# Altium PCB FT4232.PcbDoc
Units mm, origin at the board's own origin, x right, y up, seen from the top; angles counter-clockwise.
Board outline 40.2 x 40.2 mm, 2 copper layers (Top Layer, Bottom Layer); 46 components, 43 nets, 208 pads, 37 vias.
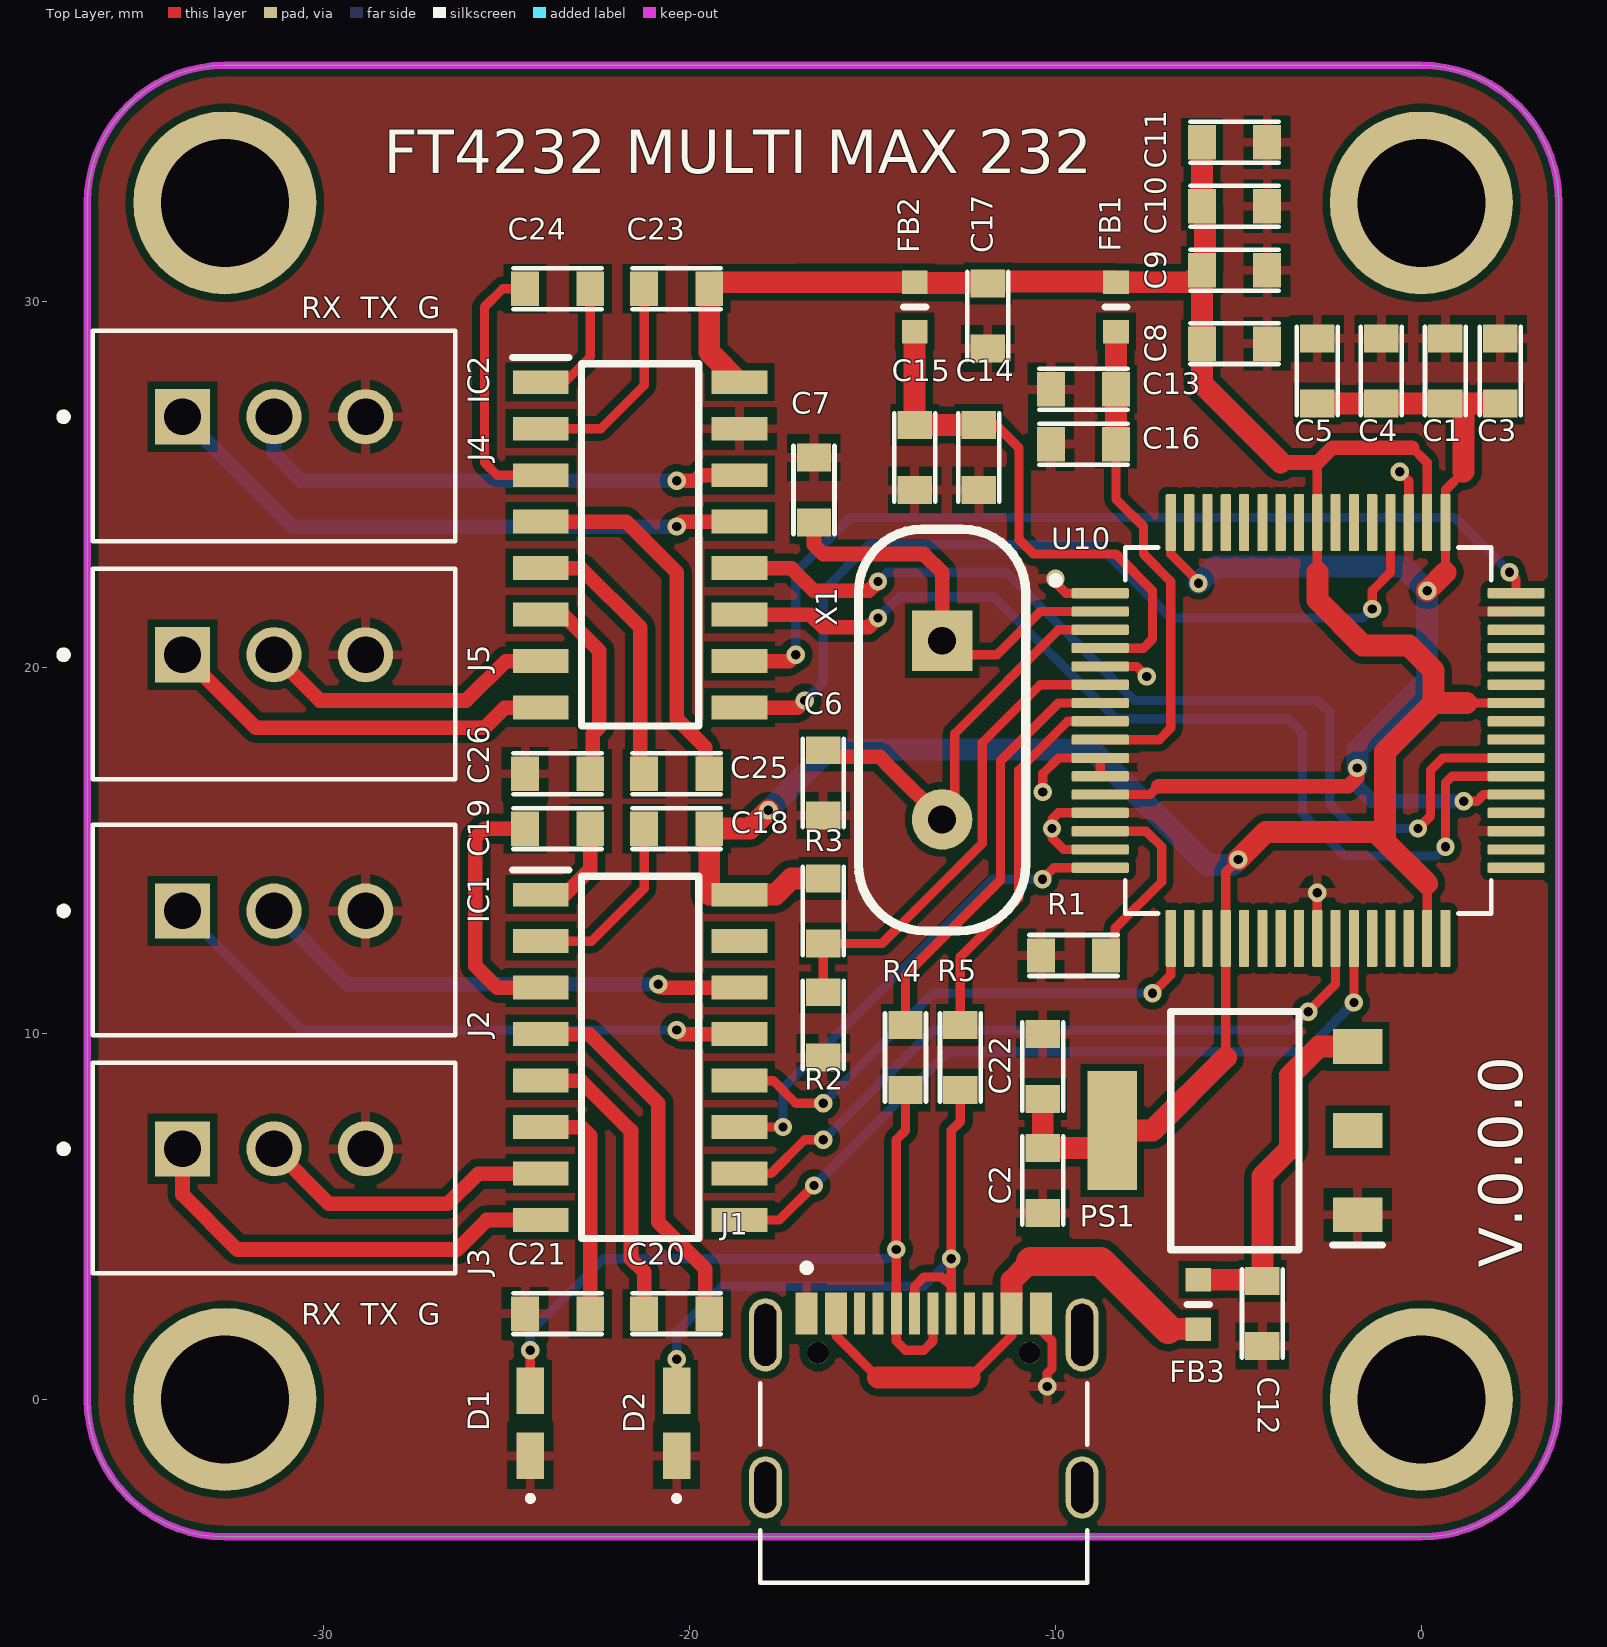
[diagram p0: Top Layer view]
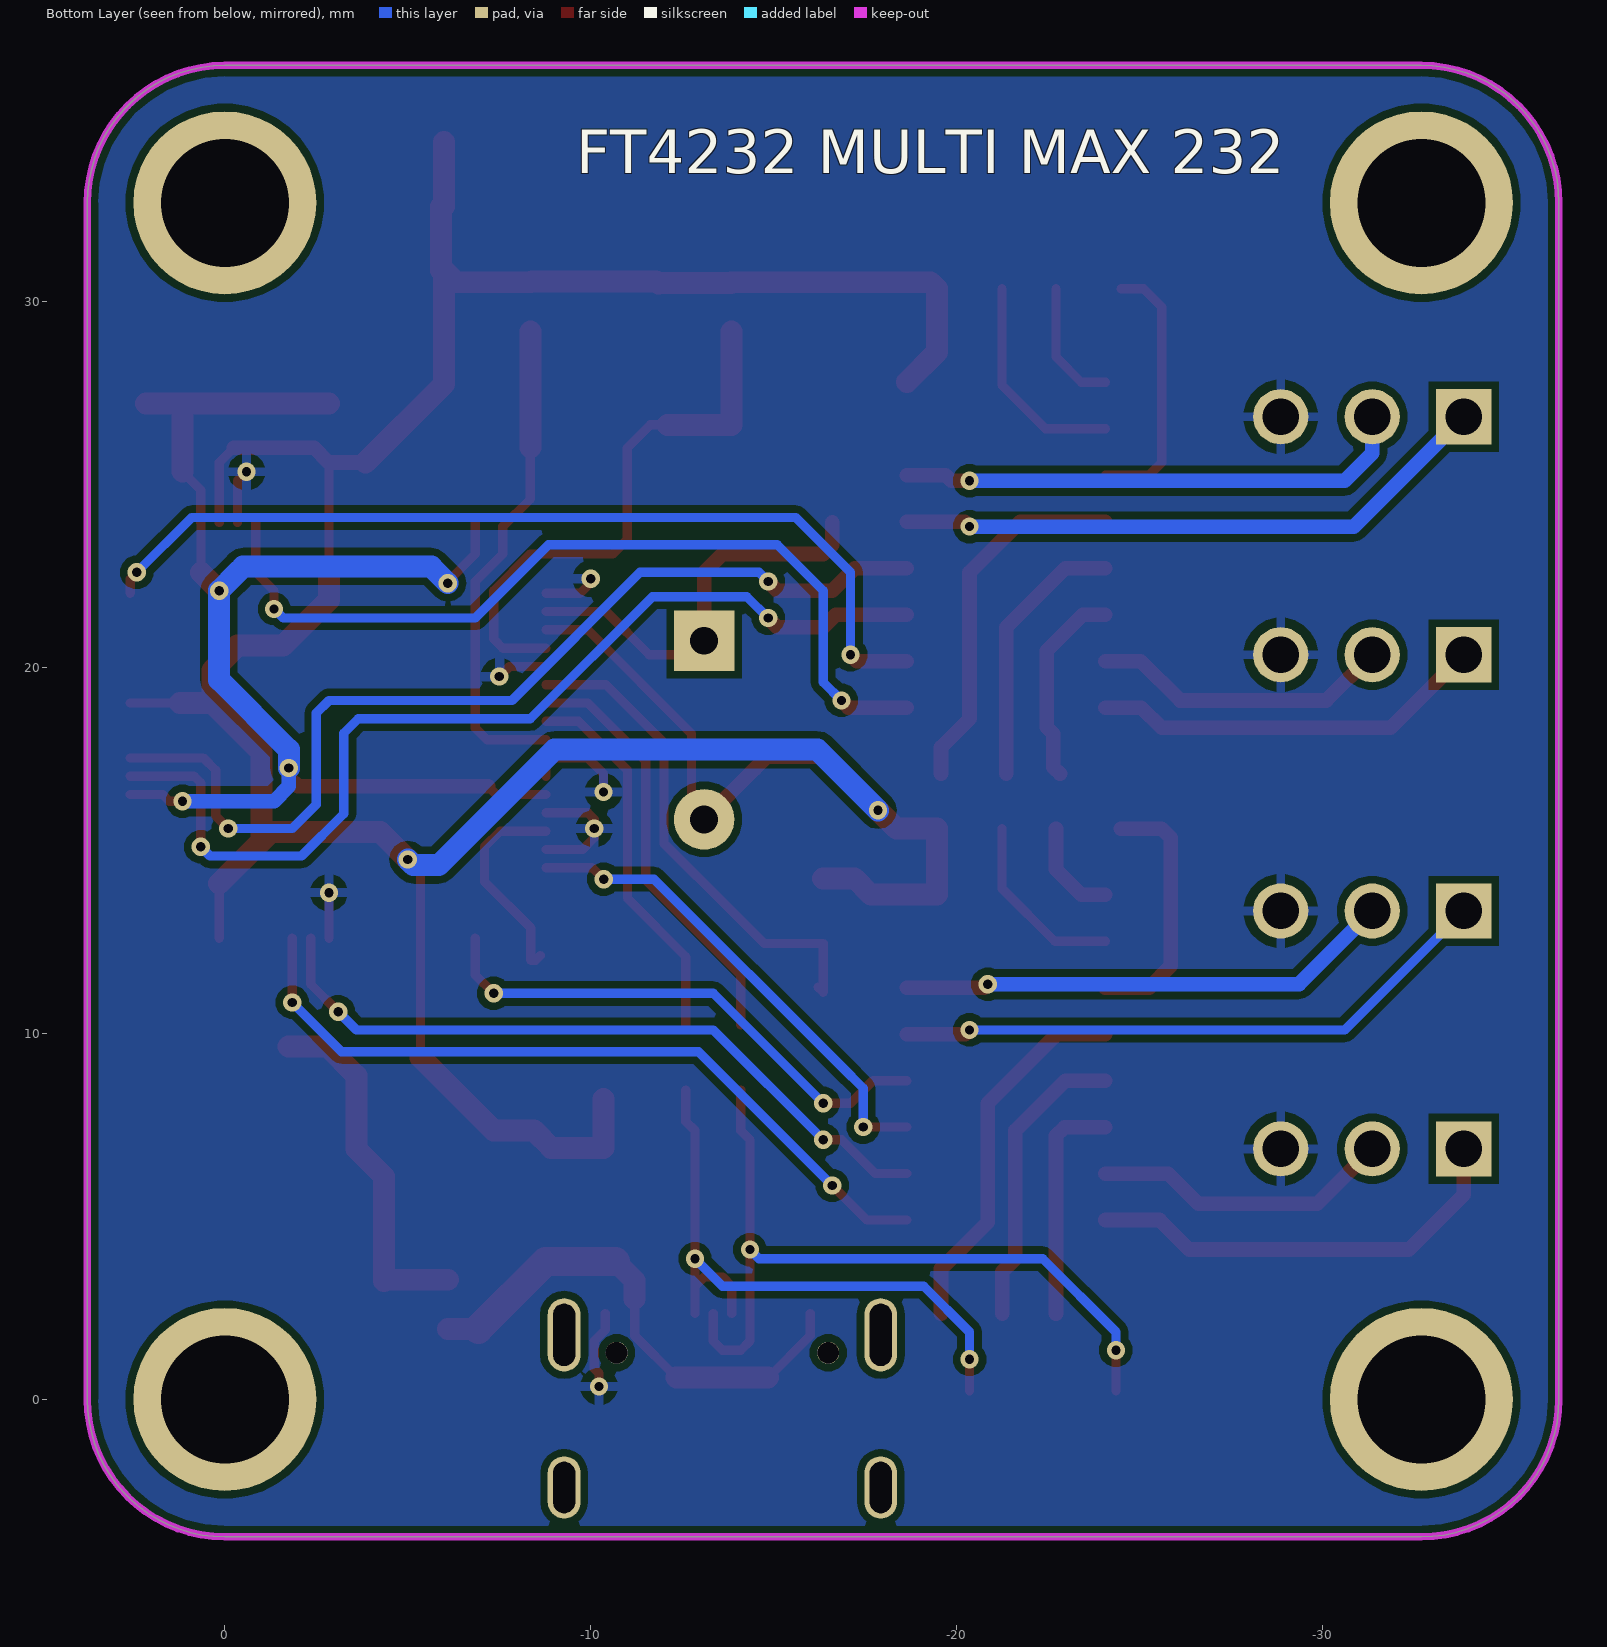
[diagram p1: Bottom Layer view, seen from below]
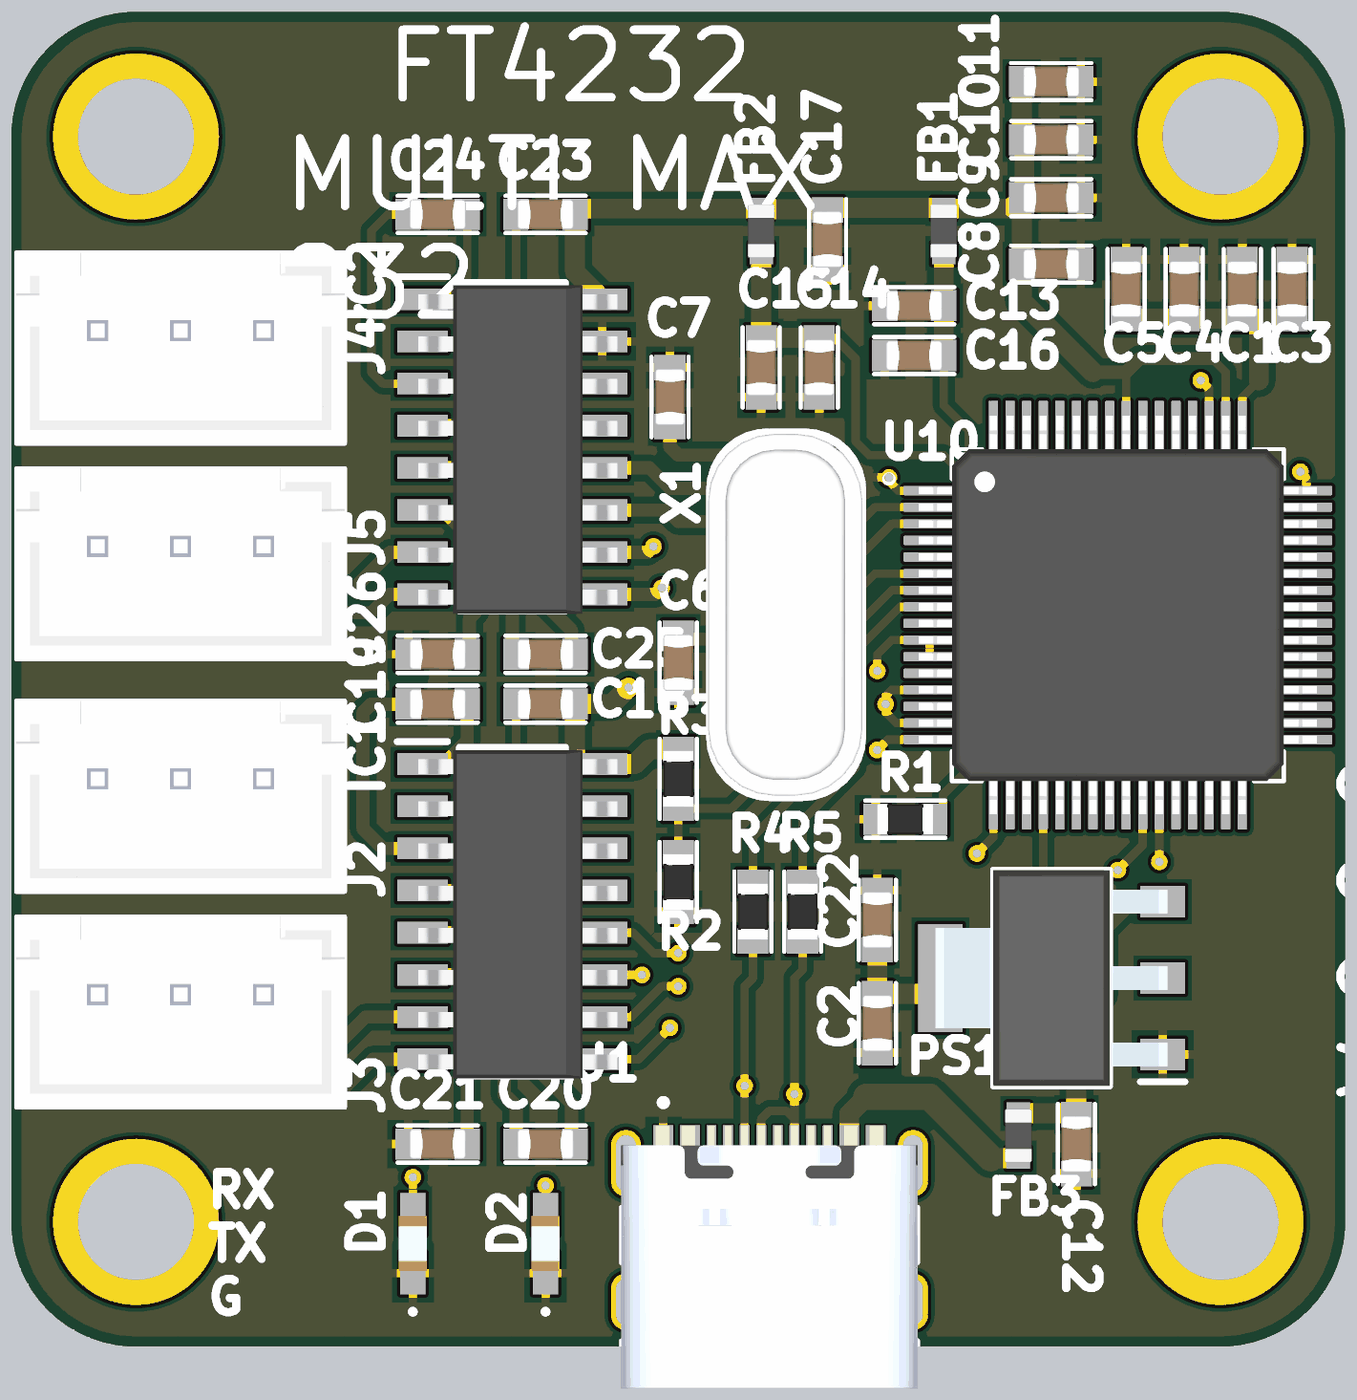
[diagram p2: 3D render of the assembled board from above, using the file's embedded part models]

## Layer stack, top to bottom
Top Solder: solder mask 0.0102, Solder Resist, Dk 3.5
Top Layer: signal copper 0.0356
Dielectric 1: dielectric 0.32, FR-4, Dk 4.8
Bottom Layer: signal copper 0.0356
Bottom Solder: solder mask 0.0102, Solder Resist, Dk 3.5

## Board outline
-36.444,0 -36.444,32.689 cw(c-32.689,32.689) -32.689,36.444 0,36.444 cw(c0,32.689) 3.756,32.689 3.756,0 cw(c0,0) 0,-3.756 -32.689,-3.756 cw(c-32.689,0)

## Design rules (kind name [scope] priority, off if disabled: settings)
Clearance [All] p1: gap=0.2 ignorepadtopadclearanceinfootprint=FALSE
DiffPairsRouting [All] p1: maxlimit=0.127 minlimit=0.127 mostfreqgap=0.127 toplayer_minwidth=0.279 toplayer_maxwidth=0.279 toplayer_prefwidth=0.279 bottomlayer_minwidth=0.279 bottomlayer_maxwidth=0.279 bottomlayer_prefwidth=0.279 impedanceprofiledriven=TRUE impedanceprofileid={888D4611-07E8-40D3-83D1-E74B6004580A} impedanceprofilevalue=90.000000 maxuncoupledlength=12.7
PolygonConnect [All] p1: connectstyle=Relief reliefconductorwidth=0.254 reliefentries=4 polygonreliefangle="90 Angle" airgapwidth=0.254
RoutingVias [All] p1: holewidth=0.711 width=1.27 viastyle="Through Hole" minholewidth=0.711 minwidth=1.27 maxholewidth=0.711 maxwidth=1.27
SolderMaskExpansion [All] p1: expansion=0.102 istentingtop=FALSE
Width [All] p1: maxlimit=0.6 minlimit=0.254 preferedwidth=0.4
29 further rules are at their usual default settings.

## Components (designator, comment, footprint, x,y, rotation, side; value= is the part's Value field where it differs from the comment)
C1 "100nf" "1608_[0603] Capacitor" 0.656,28.094 r90 top
C2 "100nf" "1608_[0603] Capacitor" -10.344,5.983 r270 top
C3 "100nf" "1608_[0603] Capacitor" 2.156,28.094 r90 top
C4 "100nf" "1608_[0603] Capacitor" -1.094,28.094 r90 top
C5 "100nf" "1608_[0603] Capacitor" -2.844,28.094 r90 top
C6 "33pF" "1608_[0603] Capacitor" -16.344,16.844 r270 top
C7 "33pF" "1608_[0603] Capacitor" -16.594,24.844 r90 top
C8 "100nf" "1608_[0603] Capacitor" -5.102,28.844 r0 top
C9 "100nf" "1608_[0603] Capacitor" -5.102,30.844 r0 top
C10 "100nf" "1608_[0603] Capacitor" -5.102,32.594 r0 top
C11 "100nf" "1608_[0603] Capacitor" -5.102,34.344 r0 top
C12 "100nf" "1608_[0603] Capacitor" -4.344,2.344 r270 top
C13 "4.7uf" "1608_[0603] Capacitor" -9.233,27.594 r180 top
C14 "4.7uf" "1608_[0603] Capacitor" -12.094,25.733 r270 top
C15 "100nf" "1608_[0603] Capacitor" -13.844,25.733 r270 top
C16 "100nf" "1608_[0603] Capacitor" -9.233,26.094 r180 top
C17 "0.1uF/25V" "1608_[0603] Capacitor" -11.844,29.594 r270 top
C18 "0.1uF/25V" "1608_[0603] Capacitor" -20.344,15.594 r0 top
C19 "0.1uF/25V" "1608_[0603] Capacitor" -23.594,15.594 r180 top
C20 "0.1uF/25V" "1608_[0603] Capacitor" -20.344,2.344 r180 top
C21 "0.1uF/25V" "1608_[0603] Capacitor" -23.594,2.344 r0 top
C22 "0.1uF/25V" "1608_[0603] Capacitor" -10.344,9.094 r90 top
C23 "0.1uF/25V" "1608_[0603] Capacitor" -20.344,30.344 r0 top
C24 "0.1uF/25V" "1608_[0603] Capacitor" -23.594,30.344 r0 top
C25 "0.1uF/25V" "1608_[0603] Capacitor" -20.344,17.094 r0 top
C26 "0.1uF/25V" "1608_[0603] Capacitor" -23.594,17.094 r0 top
D1 "PGB1010603" PGB1010603NRHF -24.344,-0.656 r90 top
D2 "PGB1010603" PGB1010603NRHF -20.344,-0.656 r90 top
FB1 "BLM18AG601SN1D" BLM18SP221SN1B -8.344,29.844 r270 top
FB2 "BLM18AG601SN1D" BLM18SP221SN1B -13.844,29.844 r270 top
FB3 "BLM18AG601SN1D" BLM18SP221SN1B -6.094,2.594 r90 top
IC1 "MAX3232ESE" SOIC127P600X175-16N -21.344,9.344 r0 top
IC2 "MAX3232ESE" SOIC127P600X175-16N -21.344,23.344 r0 top
J1 "TYPE-C-31-M-12" HRO_TYPE-C-31-M-12 -13.594,-2.406 r0 top
J2 "B3B-XH-A(LF)(SN)" JST_B3B-XH-A(LF)(SN) -31.344,12.819 r180 top
J3 "B3B-XH-A(LF)(SN)" JST_B3B-XH-A(LF)(SN) -31.344,6.319 r180 top
J4 "B3B-XH-A(LF)(SN)" JST_B3B-XH-A(LF)(SN) -31.344,26.319 r180 top
J5 "B3B-XH-A(LF)(SN)" JST_B3B-XH-A(LF)(SN) -31.344,19.819 r180 top
PS1 "ADP3338AKCZ-3.3RL7" SOT230P700X180-4N -5.094,7.344 r180 top
R1 "12k" "1608_[0603] Resistor" -9.504,12.127 r180 top
R2 "100k" "1608_[0603] Resistor" -16.344,10.233 r270 top
R3 "1k" "1608_[0603] Resistor" -16.344,13.344 r270 top
R4 "10R" "1608_[0603] Resistor" -14.094,9.344 r90 top
R5 "10R" "1608_[0603] Resistor" -12.594,9.344 r90 top
U10 "FT4232HL-Tray" QFP50P1200X1200X160-64N -3.094,18.274 r0 top
X1 "12MHz" "X TAL" -13.094,20.724 r270 top

## Footprints (in the part's own frame and the unit in brackets; to place one, negate y for a bottom-side part, rotate by r counter-clockwise, add the part's x,y. Pads: shape width x height; smd on the part's side, far side on the other; paste and mask are expansions set on the pad)
"1608_[0603] Capacitor" [mil] "Chip Capacitor, Body 1.6x0.8mm, IPC High Density"
  rect 30x37 smd: 1(-35,0) 2(35,0)
  silkscreen extent -48,-22 48,22, body extent -33,-18 33,18, height 35
"1608_[0603] Resistor" [mil] "Chip Resistor, Body 1.6x0.8mm, IPC High Density"
  rect 30x37 smd: 1(-35,0) 2(35,0)
  silkscreen extent -48,-22 48,22, body extent -33,-18 33,18, height 22
BLM18SP221SN1B [mm]
  rect 0.65x0.7 smd: 1(-0.675,0) 2(0.675,0)
  silkscreen extent 0,-0.3 0,0.3, body extent -0.8,-0.4 0.8,0.4, height 0.8
HRO_TYPE-C-31-M-12 [mm]
  rect 0.6x1.14 smd mask+0.05: A1_B12(-3.2,4.75) A4_B9(-2.4,4.75) B1_A12(3.2,4.75) B4_A9(2.4,4.75)
  rect 0.3x1.14 smd mask+0.05: A5(-1.25,4.75) A6(-0.25,4.75) A7(0.25,4.75) A8(1.25,4.75) B5(1.75,4.75) B6(0.75,4.75) B7(-0.75,4.75) B8(-1.75,4.75)
  oval 0.9x2 hole 0.6 slot 1.7 at 90 deg: S1(-4.325,4.17) S2(4.325,4.17)
  oval 0.9x1.7 hole 0.6 slot 1.4 at 90 deg: S3(-4.325,0) S4(4.325,0)
  round 0.6 hole 0.6 unplated: ""(-2.89,3.68) ""(2.89,3.68)
  silkscreen extent -4.47,-2.6 4.47,6.1, body extent -4.47,-2.6 4.47,5.31, height 3.31
JST_B3B-XH-A(LF)(SN) [mm]
  rect 1.508x1.508 / inner round 1.508 / far side rect 1.508x1.508 hole 1: 1(2.5,-0.525)
  round 1.508 hole 1: 2(0,-0.525) 3(-2.5,-0.525)
  silkscreen extent -4.95,-2.88 5.85,2.88, body extent -4.95,-2.88 4.95,2.88, height 7
PGB1010603NRHF [mm]
  rect 1.27x0.76 smd: 1(-0.89,0) 2(0.89,0)
  silkscreen extent -2.1,-0.05 -2,0.05, body extent -0.83,-0.42 0.83,0.42, height 0.36
QFP50P1200X1200X160-64N [mm]
  rrect25% 1.56x0.28 smd: 1(-5.68,3.75) 2(-5.68,3.25) 3(-5.68,2.75) 4(-5.68,2.25) 5(-5.68,1.75) 6(-5.68,1.25) 7(-5.68,0.75) 8(-5.68,0.25) 9(-5.68,-0.25) 10(-5.68,-0.75) 11(-5.68,-1.25) 12(-5.68,-1.75) 13(-5.68,-2.25) 14(-5.68,-2.75) 15(-5.68,-3.25) 16(-5.68,-3.75) 33(5.68,-3.75) 34(5.68,-3.25) 35(5.68,-2.75) 36(5.68,-2.25) 37(5.68,-1.75) 38(5.68,-1.25) 39(5.68,-0.75) 40(5.68,-0.25) 41(5.68,0.25) 42(5.68,0.75) 43(5.68,1.25) 44(5.68,1.75) 45(5.68,2.25) 46(5.68,2.75) 47(5.68,3.25) 48(5.68,3.75)
  rrect25% 0.28x1.56 smd: 17(-3.75,-5.68) 18(-3.25,-5.68) 19(-2.75,-5.68) 20(-2.25,-5.68) 21(-1.75,-5.68) 22(-1.25,-5.68) 23(-0.75,-5.68) 24(-0.25,-5.68) 25(0.25,-5.68) 26(0.75,-5.68) 27(1.25,-5.68) 28(1.75,-5.68) 29(2.25,-5.68) 30(2.75,-5.68) 31(3.25,-5.68) 32(3.75,-5.68) 49(3.75,5.68) 50(3.25,5.68) 51(2.75,5.68) 52(2.25,5.68) 53(1.75,5.68) 54(1.25,5.68) 55(0.75,5.68) 56(0.25,5.68) 57(-0.25,5.68) 58(-0.75,5.68) 59(-1.25,5.68) 60(-1.75,5.68) 61(-2.25,5.68) 62(-2.75,5.68) 63(-3.25,5.68) 64(-3.75,5.68)
  silkscreen extent -7,-5 5,5, body extent -6,-6 6,6, height 1.49
SOIC127P600X175-16N [mm]
  rect 1.525x0.65 smd: 1(-2.712,4.445) 2(-2.712,3.175) 3(-2.712,1.905) 4(-2.712,0.635) 5(-2.712,-0.635) 6(-2.712,-1.905) 7(-2.712,-3.175) 8(-2.712,-4.445) 9(2.712,-4.445) 10(2.712,-3.175) 11(2.712,-1.905) 12(2.712,-0.635) 13(2.712,0.635) 14(2.712,1.905) 15(2.712,3.175) 16(2.712,4.445)
  silkscreen extent -3.47,-4.95 1.6,5.12, body extent -2.84,-5.03 3.16,4.87, height 1.73
SOT230P700X180-4N [mm]
  rect 1.35x0.95 smd: 1(-3.35,2.3) 2(-3.35,0) 3(-3.35,-2.3)
  rect 1.35x3.25 smd: 4(3.35,0)
  silkscreen extent -4.03,-3.25 1.75,3.25, body extent -3.5,-3.25 3.5,3.25, height 1.8
"X TAL" [mil] "2 PIN XTAL"
  rect 65x65 hole 30: 1(0,0)
  round 65 hole 30: 2(192.13,0)
  silkscreen extent -120,-90 312,90, body extent -119,-93 311,91, height 130

## Part data
C6 C7: library part 100nf, Contributor=LCEDA_Lib, nameAlias=Value(F), spicePre=C, spiceSymbolName=C_0603_US
C17 C18 C19 C20 C21 C22 C23 C24 C25 C26: library part Cap_1uF_POL_10%_TANA, "0603 SMD Tantalum Capacitor", PN=F981E105MMA, Revision="July-2002: Re-released for DXP Platform."
D1 D2: "TVS Diode (Bi-directional)", Manufacturer_Name=LITTELFUSE, Mouser Part Number=N/A, Datasheet Link=https://www.littelfuse.com/data/en/data_sheets/littelfuse_pulseguard-esd_pgb1.pdf, Height=0.36mm, Manufacturer_Part_Number=PGB1010603, Mouser Price/Stock=https://www.mouser.co.uk/ProductDetail/Littelfuse/PGB1010603?qs=gybxhQrZOyG2aLlFMGOYoA%3D%3D
FB1 FB2 FB3: "Ferrite Bead", Manufacturer_Name="Murata Electronics", Mouser Part Number=81-BLM11A601S, Arrow Part Number=BLM18AG601SN1D, Arrow Price/Stock=https://www.arrow.com/en/products/blm18ag601sn1d/murata-manufacturing?utm_currency=USD&region=europe, Datasheet Link=http://www.murata.com/~/media/webrenewal/support/library/catalog/products/emc/emifil/c31e.ashx?la=en-gb, Height=0.95mm, Manufacturer_Part_Number=BLM18AG601SN1D, Mouser Price/Stock=https://www.mouser.co.uk/ProductDetail/Murata-Electronics/BLM18AG601SN1D?qs=eh6oC%2F9l24oGGaJFkAJJAA%3D%3D
IC1 IC2: library part MAX232EESE+T, "Integrated Circuit", Manufacturer_Name="Analog Devices", Mouser Part Number=700-MAX232EESET, Arrow Part Number=MAX232EESE+T, Arrow Price/Stock=https://www.arrow.com/en/products/max232eeset/analog-devices?region=nac, Datasheet Link=https://www.analog.com/MAX232E/datasheet, Height=1.75mm, Manufacturer_Part_Number=MAX232EESE+T, Mouser Price/Stock=https://www.mouser.co.uk/ProductDetail/Analog-Devices-Maxim-Integrated/MAX232EESE%2bT?qs=CDqwynd4ZNo03Ae2N7OgQA%3D%3D
J1: "USB Connectors 24 Receptacle 1 8.94*7.3mm RoHS", Package=Package, Check_prices=https://www.snapeda.com/parts/TYPE-C-31-M-12/HRO+Electronics+Co.%252C+Ltd./view-part/?ref=eda, MF="HRO Electronics Co., Ltd.", MP=TYPE-C-31-M-12, SnapEDA_Link=https://www.snapeda.com/parts/TYPE-C-31-M-12/HRO+Electronics+Co.%252C+Ltd./view-part/?ref=snap
J2 J3 J4 J5: "Connector Header Through Hole 3 position 0.098 (2.50mm)", Package=None, Check_prices=https://www.snapeda.com/parts/B3B-XH-A(LF)(SN)/JST/view-part/?ref=eda, MF="JST Sales", MP=B3B-XH-A(LF)(SN), SnapEDA_Link=https://www.snapeda.com/parts/B3B-XH-A(LF)(SN)/JST/view-part/?ref=snap
PS1: "Power Supply", Manufacturer_Name="Analog Devices", Mouser Part Number=584-ADP3338AKCZ3.3R7, Arrow Part Number=ADP3338AKCZ-3.3RL7, Arrow Price/Stock=https://www.arrow.com/en/products/adp3338akcz-3.3rl7/analog-devices?region=nac, Datasheet Link=https://ms.componentsearchengine.com/Datasheets/2/ADP3338AKCZ-3.3RL7.pdf, Height=1.8mm, Manufacturer_Part_Number=ADP3338AKCZ-3.3RL7, Mouser Price/Stock=https://www.mouser.co.uk/ProductDetail/Analog-Devices/ADP3338AKCZ-3.3RL7?qs=WIvQP4zGanhWiNZFvSpqBQ%3D%3D
R4 R5: library part 100k, Contributor=LCEDA_Lib, nameAlias=Value(Ω), spicePre=R, spiceSymbolName=R_0603_EU
X1: JLCPCB Part Class="Extended Part", Manufacturer=CTS(西迪斯), Manufacturer Part=ATS240CSM-1E, Contributor=LCSC, nameAlias=Value, spicePre=X, spiceSymbolName=ATS240CSM-1E, Supplier=LCSC, Supplier Part=C1985692
C1 C2 C3 C4 C5 C8 C9 C10 C11 C12 C13 C14 C15 C16: Contributor=LCEDA_Lib, nameAlias=Value(F), spicePre=C, spiceSymbolName=C_0603_US
R1 R2 R3: Contributor=LCEDA_Lib, nameAlias=Value(Ω), spicePre=R, spiceSymbolName=R_0603_EU
U10: spicePre=U, spiceSymbolName=FT4232HL-Tray

## Free pads (board coordinates)
  round 5 hole 3.5: 1(-32.689,32.689) 1(-32.689,0) 1(0,0) 1(0,32.689)

## Via types
v1: diameter 0.5, hole 0.254, Top Layer to Bottom Layer, 37 vias

## Nets (pads, with @x,y where several pads share a name; then routed paths per layer and width w, separated by ;. In a path a pad name is that pad's centre, name@x,y a point inside that pad or via, vN(x,y) a via of type N, cw(c..) or ccw(c..) an arc to the next point about the centre after c; other vN are vias at no path point)
+1.8V: C1.1 C3.1 C4.1 C5.1 U10.12 U10.37 U10.49 U10.64 | length 37.4
  Top Layer w0.25: 0.656,22.594 U10.49
  Top Layer w0.254: U10.12 -7.414,16.524 -7.189,16.75 ; U10.64 -6.844,23.094 -6.09,22.34 v1(-6.09,22.3) ; U10.49 0.656,24.844 1.156,25.344 ; v1(1.156,16.344) 1.516,16.344 1.696,16.524 U10.37
  Top Layer w0.4: -7.189,16.75 -2,16.75 -1.75,17 v1(-1.75,17.25)
  Top Layer w0.6: C5.1 C4.1 C1.1 1.156,27.205 ; v1(0.156,22.094) 0.656,22.594 ; 1.156,25.344 1.156,27.205 ; C3.1 1.156,27.205
  Bottom Layer w0.4: v1(-1.75,17.25) -1.75,16.75 -1.344,16.344 v1(1.156,16.344)
  Bottom Layer w0.6: v1(-6.09,22.3) -5.64,22.75 -0.5,22.75 -0.344,22.594 v1(0.156,22.094) 0.156,19.656 -1.75,17.75 v1(-1.75,17.25)
+3.3V: C2.1 C8.1 C9.1 C10.1 C11.1 C17.1 C18.2 C22.1 C23.2 FB1.1 FB2.1 IC1.16 IC2.16 PS1.4 R3.1 U10.20 U10.31 U10.42 U10.50 U10.56 | length 89.6
  Top Layer w0.254: -5.344,9.344 -5.344,14.406 v1(-5,14.75) ; -2.844,22.594 U10.56 -2.844,25.557 ; -0.25,26 0.156,25.594 U10.50 ; U10.31 0.156,14.094 ; 1.226,19.024 U10.42
  Top Layer w0.4: -3.844,25.594 -2.844,25.594 -2.439,26 -0.25,26
  Top Layer w0.6: IC2.16 -19.455,28.612 C23.2 -19.28,30.519 -17.094,30.519 FB2.1 -13.826,30.501 -11.862,30.501 C17.1 ; v1(-17.844,16.094) -18.344,15.594 C18.2 -19.455,13.789 IC1.16 -17.649,13.789 -17.205,14.233 R3.1 ; C17.1@-11.826,30.501 -11.783,30.544 FB1.1@-8.394,30.544 ; C22.1 C2.1 -8.916,6.872 PS1.4 -7.344,7.344 -5.344,9.344 ; FB1.1 -6.316,30.519 C9.1 C8.1 -5.991,27.741 -3.844,25.594 ; C10.1 C11.1 ; C9.1@-5.91,30.844 C10.1@-5.91,32.594 ; v1(-5,14.75) -4.25,15.5 -1.25,15.5 -1,15.25 ; -2.844,22.594 -2.844,21.844 -1.594,20.594 -0.344,20.594 0.336,19.914 0.336,19.024 ; 0.156,14.094 -1,15.25 ; 1.226,19.024 0.336,19.024 ; -1,15.25 -1,15.5 -1,17.689 0.336,19.024
  Bottom Layer w0.6: v1(-17.844,16.094) -16.189,17.75 -9,17.75 -5.844,14.594 -5.156,14.594 v1(-5,14.75)
+5V: C12.1 FB3.2 PS1.3 | length 9.9
  Top Layer w0.6: FB3.2 -4.38,3.269 C12.1 -4.344,6.094 -3.594,6.844 -3.594,8.844 -2.794,9.644 PS1.3
GND: C1.2 C2.2 C3.2 C4.2 C5.2 C6.2 C7.2 C8.2 C9.2 C10.2 C11.2 C12.2 C13.2 C14.2 C15.2 C16.2 C17.2 C21.1 C22.2 C26.1 D1.1 D2.1 IC2.15 J1.A1_B12 J1.B1_A12 J2.3 J3.3 J4.3 J5.3 PS1.1 R1.2 R2.2 U10.1 U10.5 U10.10 U10.11 U10.13 U10.15 U10.25 U10.35 U10.47 U10.51 | length 13.8
  Top Layer w0.254: J1.B1_A12 -10.394,1.894 -10.094,1.594 -10.094,0.844 -10.221,0.717 v1(-10.221,0.351) ; v1(-10.344,16.594) -10.344,17.094 -9.914,17.524 U10.10 U10.11 ; v1(-9.996,22.421) -9.996,22.311 -9.709,22.024 U10.1 ; U10.15 -9.774,15.024 -10.094,15.344 v1(-10.094,15.594) -10.094,15.844 -9.914,16.024 U10.13 ; U10.5 -7.774,20.024 v1(-7.5,19.75) ; U10.25 v1(-2.844,13.844) ; v1(-0.594,25.344) -0.344,25.094 U10.51
NetC6_1: C6.1 U10.3 X1.2 | length 11.7
  Top Layer w0.254: X1.2 -12.75,16.189 -12.75,18.189 -9.914,21.024 U10.3
  Top Layer w0.4: C6.1 -16.163,17.552 -15.393,17.552 -14.802,17.552 -14.483,17.233 X1.2
NetC7_1: C7.1 U10.2 X1.1 | length 11.3
  Top Layer w0.254: X1.1 -12.714,20.344 -11.594,20.344 -10.414,21.524 U10.2
  Top Layer w0.4: C7.1 -16.594,23.344 -16.344,23.094 -13.594,23.094 -13.094,22.594 X1.1
NetC13_1: C13.1 C16.1 FB1.2 U10.9 | length 13.5
  Top Layer w0.254: U10.9 -7.164,18.024 -6.844,18.344 -6.844,22.344 -7.594,23.094 -7.594,23.844 -8.344,24.594 C16.1@-8.344,26.005
  Top Layer w0.6: C16.1@-8.344,26.005 C16.1 C13.1 FB1.2
NetC14_1: C14.1 C15.1 FB2.2 U10.4 | length 15.2
  Top Layer w0.254: C14.1 -11.622,26.622 -10.993,25.993 -10.993,23.493 -10.594,23.094 -8.344,23.094 -7.344,22.094 -7.344,20.774 -7.594,20.524 U10.4
  Top Layer w0.6: FB2.2 C15.1 C14.1
NetC18_1: C18.1 IC1.2 | length 5.1
  Top Layer w0.254: IC1.2 -22.669,12.519 -21.233,13.955 C18.1
NetC19_1: C19.1 IC1.1 | length 2.7
  Top Layer w0.4: IC1.1 -23.399,13.789 -22.705,14.483 C19.1
NetC19_2: C19.2 IC1.3 | length 7
  Top Layer w0.4: C19.2 -25.594,15.594 -25.844,15.344 -25.844,11.844 -25.249,11.249 IC1.3
NetC20_1: C20.1 IC1.4 | length 10.3
  Top Layer w0.4: IC1.4 -22.729,9.979 -20.844,8.094 -20.844,4.844 -19.566,3.566 C20.1@-19.566,2.344
NetC20_2: C20.2 IC1.5 | length 8.2
  Top Layer w0.4: IC1.5 -22.959,8.709 -21.594,7.344 -21.594,3.844 -21.233,3.483 C20.2
NetC21_2: C21.2 IC1.6 | length 6.3
  Top Layer w0.4: IC1.6 -22.939,7.439 -22.705,7.205 C21.2
NetC23_1: C23.1 IC2.2 | length 6
  Top Layer w0.254: IC2.2 -22.419,26.519 -21.233,27.705 C23.1
NetC24_1: C24.1 IC2.3 | length 7.2
  Top Layer w0.254: C24.1 -25.094,30.344 -25.594,29.844 -25.594,25.594 -25.249,25.249 IC2.3
NetC24_2: C24.2 IC2.1 | length 3.5
  Top Layer w0.254: IC2.1 -23.399,27.789 -22.705,28.483 C24.2
NetC25_1: C25.1 IC2.5 | length 7.4
  Top Layer w0.4: IC2.5 -22.959,22.709 -21.344,21.094 C25.1@-21.344,17.094
NetC25_2: C25.2 IC2.4 | length 10.1
  Top Layer w0.4: IC2.4 -21.729,23.979 -20.344,22.594 -20.344,18.594 -19.566,17.816 C25.2@-19.566,17.094
NetC26_2: C26.2 IC2.6 | length 5.5
  Top Layer w0.4: IC2.6 -23.439,21.439 -22.455,20.455 -22.455,18.364 -22.635,18.184 -22.635,17.275 C26.2@-22.816,17.094
NetD1_2: D1.2 J1.A7 J1.B7 R4.1 | length 21.5
  Top Layer w0.254: D1.2 v1(-24.344,1.344) ; R4.1 -14.094,7.344 -14.344,7.094 v1(-14.344,4.094) -14.344,1.594 -14.094,1.344 -13.594,1.344 -13.344,1.594 J1.A7
  Bottom Layer w0.254: v1(-24.344,1.344) -24.344,1.844 -22.344,3.844 -14.594,3.844 v1(-14.344,4.094)
NetD2_2: D2.2 J1.A6 J1.B6 R5.1 | length 18.1
  Top Layer w0.254: D2.2 v1(-20.344,1.094) ; J1.A6 -13.844,3.094 -13.594,3.344 -13.094,3.344 -12.844,3.094 ; J1.B6 -12.844,3.094 ; R5.1 -12.594,7.594 -12.844,7.344 v1(-12.844,3.844) -12.844,3.094
  Bottom Layer w0.254: v1(-20.344,1.094) -20.344,1.844 -19.094,3.094 -13.594,3.094 v1(-12.844,3.844)
NetFB3_1: FB3.1 J1.A4_B9 J1.B4_A9 | length 13.7
  Top Layer w0.254: J1.A4_B9 -15.994,1.744 -14.844,0.594 ; -12.344,0.594 -11.194,1.744 J1.B4_A9 J1.B4_A9@-11.194,2.744
  Top Layer w0.6: -14.844,0.594 -12.344,0.594 ; J1.B4_A9@-11.194,2.744 -11.194,3.244 -10.844,3.594 ; -6.919,1.919 FB3.1
  Top Layer w0.8: -10.67,3.768 -8.768,3.768 -6.919,1.919
NetIC1_7: IC1.7 J3.2 | length 8.3
  Top Layer w0.4: J3.2 -29.844,5.344 -26.594,5.344 -25.769,6.169 IC1.7
NetIC1_8: IC1.8 J3.1 | length 12
  Top Layer w0.4: J3.1 -33.844,5.594 -32.344,4.094 -26.344,4.094 -25.539,4.899 IC1.8
NetIC1_9: IC1.9 U10.27 | length 21
  Top Layer w0.254: IC1.9 -17.539,4.899 v1(-16.594,5.844) ; v1(-1.844,10.844) U10.27
  Bottom Layer w0.254: v1(-16.594,5.844) -12.939,9.5 -3.189,9.5 v1(-1.844,10.844)
NetIC1_10: IC1.10 U10.26 | length 19.7
  Top Layer w0.254: IC1.10 -17.769,6.169 -16.844,7.094 v1(-16.344,7.094) ; v1(-3.094,10.594) -2.344,11.344 U10.26
  Bottom Layer w0.254: v1(-16.344,7.094) -13.344,10.094 -3.594,10.094 v1(-3.094,10.594)
NetIC1_11: IC1.11 U10.16 | length 13.4
  Top Layer w0.254: IC1.11 v1(-17.439,7.439) ; v1(-10.349,14.213) -10.038,14.524 U10.16
  Bottom Layer w0.254: v1(-17.439,7.439) -17.439,7.908 -17.439,8.499 -16.844,9.094 -11.726,14.213 v1(-10.349,14.213)
NetIC1_12: IC1.12 U10.17 | length 14.5
  Top Layer w0.254: IC1.12 -17.709,8.709 -17.094,8.094 v1(-16.344,8.094) ; v1(-7.344,11.094) -6.844,11.594 U10.17
  Bottom Layer w0.254: v1(-16.344,8.094) -13.344,11.094 v1(-7.344,11.094)
NetIC1_13: IC1.13 J2.1 | length 16.6
  Top Layer w0.4: v1(-20.344,10.094) -20.229,9.979 IC1.13
  Bottom Layer w0.254: J2.1 -30.594,10.094 v1(-20.344,10.094)
NetIC1_14: IC1.14 J2.2 | length 13.6
  Top Layer w0.4: v1(-20.844,11.344) -20.749,11.249 IC1.14
  Bottom Layer w0.4: J2.2 -29.344,11.344 v1(-20.844,11.344)
NetIC2_7: IC2.7 J5.2 | length 8.3
  Top Layer w0.4: J5.2 -30.094,19.094 -26.094,19.094 -25.019,20.169 IC2.7
NetIC2_8: IC2.8 J5.1 | length 10.8
  Top Layer w0.4: J5.1 -31.844,18.344 -25.594,18.344 -25.039,18.899 IC2.8
NetIC2_9: IC2.9 U10.52 | length 24.1
  Top Layer w0.254: v1(-1.344,21.594) -1.344,22.094 -0.844,22.594 U10.52
  Top Layer w0.4: IC2.9 -17.039,18.899 v1(-16.844,19.094)
  Bottom Layer w0.254: v1(-16.844,19.094) -16.344,19.594 -16.344,22.094 -15.094,23.344 -8.844,23.344 -6.844,21.344 -1.594,21.344 v1(-1.344,21.594)
NetIC2_10: IC2.10 U10.48 | length 25.2
  Top Layer w0.254: v1(2.406,22.594) 2.586,22.414 U10.48
  Top Layer w0.4: IC2.10 -17.269,20.169 v1(-17.094,20.344)
  Bottom Layer w0.254: v1(-17.094,20.344) -17.094,22.594 -15.594,24.094 0.906,24.094 v1(2.406,22.594)
NetIC2_11: IC2.11 U10.38 | length 27.9
  Top Layer w0.254: v1(0.656,15.094) 0.656,16.844 0.836,17.024 U10.38
  Top Layer w0.4: IC2.11 -16.689,21.439 -16.344,21.094 -15.094,21.094 v1(-14.844,21.344)
  Bottom Layer w0.254: v1(-14.844,21.344) -14.258,21.931 -11.681,21.931 -8.344,18.594 -3.644,18.594 -3.25,18.201 -3.25,16 -2.094,14.844 0.406,14.844 v1(0.656,15.094)
NetIC2_12: IC2.12 U10.39 | length 27.6
  Top Layer w0.254: v1(-0.094,15.594) 0.25,15.939 0.25,17.189 0.586,17.524 U10.39
  Top Layer w0.4: IC2.12 -17.209,22.709 -16.594,22.094 -15.094,22.094 v1(-14.844,22.344)
  Bottom Layer w0.254: v1(-14.844,22.344) -14.594,22.594 -11.344,22.594 -7.844,19.094 -2.844,19.094 -2.5,18.75 -2.5,16.25 -1.844,15.594 v1(-0.094,15.594)
NetIC2_13: IC2.13 J4.1 | length 16.5
  Top Layer w0.4: v1(-20.344,23.844) -20.209,23.979 IC2.13
  Bottom Layer w0.4: J4.1 -30.844,23.844 v1(-20.344,23.844)
NetIC2_14: IC2.14 J4.2 | length 14.1
  Top Layer w0.4: v1(-20.344,25.094) -19.844,25.094 -19.689,25.249 IC2.14
  Bottom Layer w0.4: J4.2 -31.344,25.844 -30.594,25.094 v1(-20.344,25.094)
NetR1_1: R1.1 U10.14 | length 5.8
  Top Layer w0.254: U10.14 -7.524,15.524 -7.094,15.094 -7.094,14.144 -8.361,12.877 -8.361,12 -8.488,12 R1.1
NetR2_1: R2.1 R3.2 U10.6 | length 13.6
  Top Layer w0.254: R2.1@-16.205,11.261 R2.1 R3.2 -14.733,12.455 -13.825,13.363 -12,15.189 -12,17.939 -10.414,19.524 U10.6
NetR4_2: R4.2 U10.7 | length 11.7
  Top Layer w0.254: R4.2 -14.094,11.594 -11.5,14.189 -11.5,17.439 -9.914,19.024 U10.7
NetR5_2: R5.2 U10.8 | length 10.4
  Top Layer w0.254: R5.2 -12.594,12.094 -11,13.689 -11,17.189 -9.664,18.524 U10.8
pads on no net: IC1.15 J1. J1.A5 J1.A8 J1.B5 J1.B8 J1.S1 J1.S2 J1.S3 J1.S4 PS1.2 U10.18 U10.19 U10.21 U10.22 U10.23 U10.24 U10.28 U10.29 U10.30 U10.32 U10.33 U10.34 U10.36 U10.40 U10.41 U10.43 U10.44 U10.45 U10.46 U10.53 U10.54 U10.55 U10.57 U10.58 U10.59 U10.60 U10.61 U10.62 U10.63

## Polygon pours and split planes (outlines as drawn)
GND on Top Layer "GND_L01_P002" (solid, pour order 2): -33.407,36.636 1.406,36.636 3.906,34.136 3.906,-1.114 1.156,-3.864 -33.844,-3.864 -36.594,-1.114 -36.594,33.803
GND on Bottom Layer "GND_L02_P001" (solid, pour order 1): -33.434,36.656 1.378,36.656 3.878,34.156 3.878,-1.094 1.128,-3.844 -33.872,-3.844 -36.622,-1.094 -36.622,33.823

## Keep-outs
Keep-Out Layer:
  the board outline again, w0.2

## Silkscreen, mask and mechanical layers (free items; w line width, h text height)
Top Overlay:
  text "FT4232 MULTI MAX 232" at -28.344,33.094 h2.03
  text "RX  TX  G" at -30.594,29.344 h1
  text "V.0.0.0" at 3.156,3.594 h2.03 r90
  text "RX  TX  G" at -30.594,1.844 h1
Bottom Overlay:
  text "FT4232 MULTI MAX 232" at -9.594,33.094 h2.03

## Text inside footprints (layer, text, board x,y; h text height)
J1: Mechanical 13 "PCB EDGE" at -8.394,-4.306 h0.61